# Altium PCB pcbLabIEEE.PcbDoc
Units mm, origin at the board's own origin, x right, y up, seen from the top; angles counter-clockwise.
Board outline 62 x 54 mm, 2 copper layers (Top Layer, Bottom Layer); 27 components, 13 nets, 100 pads, 2 vias.
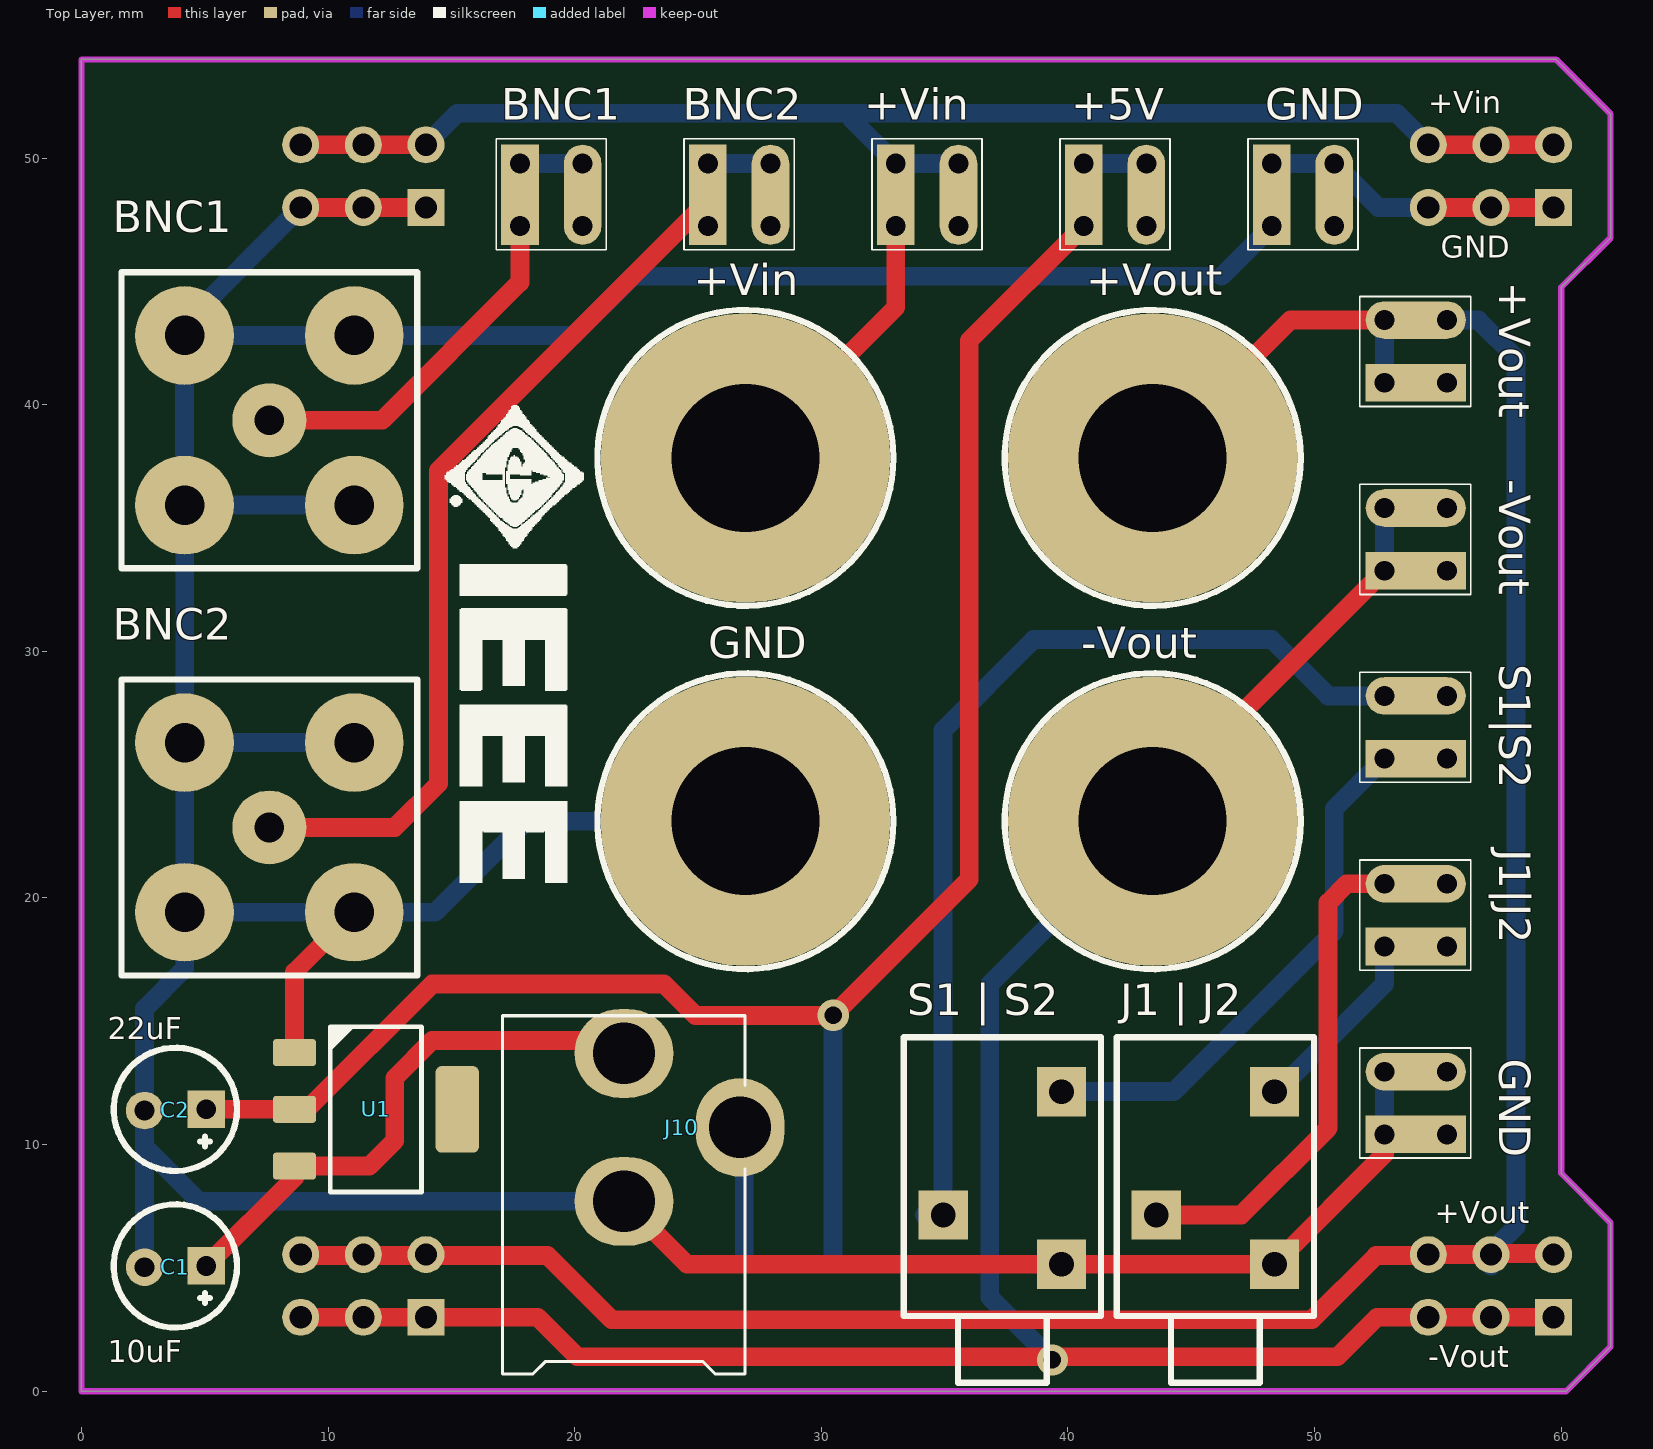
[diagram p0: Top Layer view]
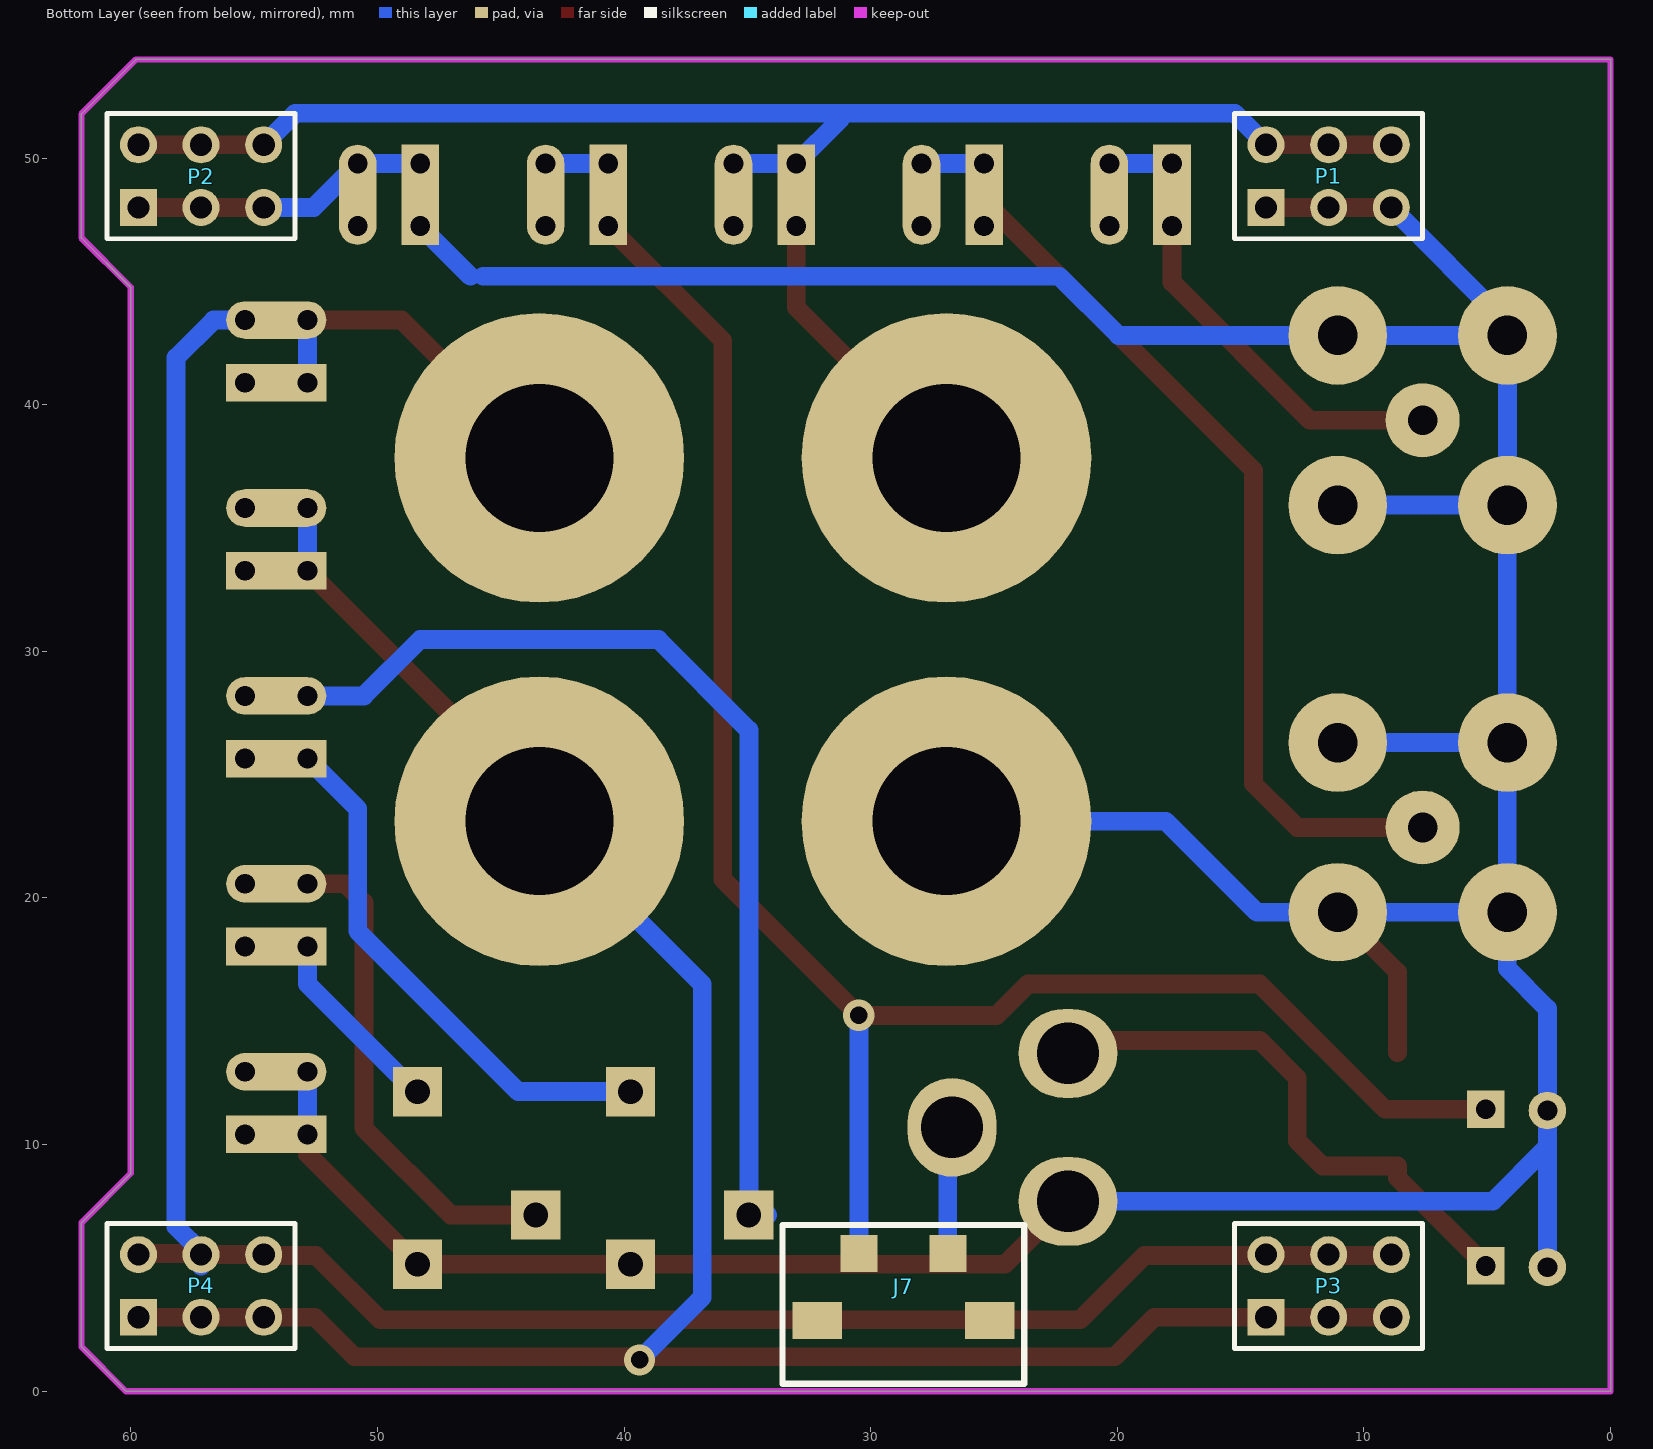
[diagram p1: Bottom Layer view, seen from below]

## Layer stack, top to bottom
Top Solder: solder mask 0.0102, Solder Resist, Dk 3.5
Top Layer: signal copper 0.0356
Dielectric 1: dielectric 0.32, FR-4, Dk 4.8
Bottom Layer: signal copper 0.0356
Bottom Solder: solder mask 0.0102, Solder Resist, Dk 3.5

## Board outline
0,0 0,54 59.792,54 62,51.792 62,46.76 60,44.76 60,8.834 62,6.834 62,1.802 60.198,0

## Design rules (kind name [scope] priority, off if disabled: settings)
Clearance [All] p1: gap=0.254
PolygonConnect [All] p1: connectstyle=Relief reliefconductorwidth=0.254 reliefentries=4 polygonreliefangle="90 Angle" airgapwidth=0.254
RoutingVias [All] p1: holewidth=0.711 width=1.27 viastyle="Through Hole" minholewidth=0.711 minwidth=1.27 maxholewidth=0.711 maxwidth=1.27
SolderMaskExpansion [All] p1: expansion=0.102
UnpouredPolygon [All] p1: allowunpoured=FALSE
Width [All] p1: maxlimit=0.762 minlimit=0.762 preferedwidth=0.762
29 further rules are at their usual default settings.

## Classes and differential pairs
component class pcbLabIEEE: +5V +Vin +Vout -Vout BNC1 BNC2 C1 C2 GND J1 J2 J7 J10 P1 P2 P3 P4 S1 S2 U1

## Components (designator, comment, footprint, x,y, rotation, side; value= is the part's Value field where it differs from the comment)
+5V "Header" HDR1X2 40.64,49.784 r0 top (schematic designator H7)
+Vin "BANANA" Banana 26.924,37.846 r0 top (schematic designator J2)
+Vin "Header" HDR1X2 33.02,49.784 r0 top (schematic designator H5)
+Vout "Header" HDR1X2 52.832,40.894 r90 top (schematic designator H9)
+Vout "BANANA" Banana 43.434,37.846 r0 top (schematic designator J3)
-Vout "BANANA" Banana 43.434,23.114 r0 top (schematic designator J6)
-Vout "Header" HDR1X2 52.832,33.274 r90 top (schematic designator H8)
BNC1 "BNC Fem. 50R" CONN_BNC 7.62,39.37 r0 top (schematic designator J1)
BNC1 "Header" HDR1X2 17.78,49.784 r0 top (schematic designator H1)
BNC2 "BNC Fem. 50R" CONN_BNC 7.62,22.86 r0 top (schematic designator J4)
BNC2 "Header" HDR1X2 25.4,49.784 r0 top (schematic designator H2)
C1 "10uF" Capacitor_E 3.81,5.08 r180 top
C2 "22uF" Capacitor_E 3.81,11.43 r180 top
GND "BANANA" Banana 26.924,23.114 r0 top (schematic designator J5)
GND "Header" HDR1X2 52.832,10.414 r90 top (schematic designator H10)
GND "Header" HDR1X2 48.26,49.784 r0 top (schematic designator H6)
"J1 | J2" "Audio Jack" CONN_AUDIO 45.974,3.048 r90 top (schematic designator J8)
J1|J2 "Header" HDR1X2 52.832,18.034 r90 top (schematic designator H3)
J7 "USB Micro Type B (recommended if hand soldering)" USB_MICRO-B_v2 29.972,5.842 r180 bottom
J10 "CONN_PWR_JACK_2.1x5.5mm" CONN_PWR_JACK_2.1x5.5mm 22,0 r180 top
P1 "Header 3X2A" HDR2X3_CEN 13.97,48 r180 bottom
P2 "Header 3X2A" HDR2X3_CEN 59.69,48 r180 bottom
P3 "Header 3X2A" HDR2X3_CEN 13.97,3 r180 bottom
P4 "Header 3X2A" HDR2X3_CEN 59.69,3 r180 bottom
"S1 | S2" "Audio Jack" CONN_AUDIO 37.338,3.048 r90 top (schematic designator J9)
S1|S2 "Header" HDR1X2 52.832,25.654 r90 top (schematic designator H4)
U1 "AMS1117" SOT223 11.938,11.43 r0 top

## Footprints (in the part's own frame and the unit in brackets; to place one, negate y for a bottom-side part, rotate by r counter-clockwise, add the part's x,y. Pads: shape width x height; smd on the part's side, far side on the other; paste and mask are expansions set on the pad)
Banana [mm] "Female"
  round 11.746 hole 6: 1(0,0)
  silkscreen extent -6,-6 6,6
Capacitor_E [mm]
  rect 1.524x1.524 hole 0.8: 1(-1.25,0)
  round 1.524 hole 0.8: 2(1.25,0.05)
  silkscreen extent -2.5,-2.5 2.5,2.5, body extent -2.49,-2.45 2.49,2.55, height 1.5
CONN_AUDIO [mm]
  rect 2x2 hole 1: 1(2.1,-2.4) 2(4.1,2.4) 3(9.1,-2.4)
  silkscreen extent -2.7,-4 11.3,4
CONN_BNC [mm]
  round 3 hole 1.2: 1(0,0)
  round 4 hole 1.6: 2(-3.44,-3.44) 2(-3.44,3.44) 2(3.44,-3.44) 2(3.44,3.44)
  silkscreen extent -6,-6 6,6
CONN_PWR_JACK_2.1x5.5mm [mm] "Power Connector, 2.1mm ID, 5.5mm OD"
  oval 4x3.6 hole 2.5: 1(0,-13.7) 2(0,-7.7)
  oval 3.6x4 hole 2.5: 3(-4.7,-10.7)
  silkscreen extent -4.9,-15.22 4.92,-0.7, body extent -4.9,-14.1 4.5,0, height 11
HDR1X2 [mil] "Connector; Header; 2 Position"
  rect 60x160 hole 31.5 copper offset 0,50: 1(0,-100)
  rect 60x160 hole 31.5 copper offset 0,-50: 1(0,0)
  oval 60x160 hole 31.5 copper offset 0,50: 2(100,-100)
  oval 60x160 hole 31.5 copper offset 0,-50: 2(100,0)
  silkscreen extent -38,-138 138,39
HDR2X3_CEN [mm] "Connector; Header; 3x2 Position"
  rect 1.5x1.5 hole 0.9: 1(0,0)
  round 1.5 hole 0.9: 2(2.54,0) 3(5.08,0) 4(0,2.54) 5(2.54,2.54) 6(5.08,2.54)
  silkscreen extent -1.27,-1.27 6.35,3.81
SOT223 [mm] "SOT223 /SC-73"
  round 1 on Mech15: 0(0,0)
  rrect25% 1.75x1.1 smd: 1(-3.3,2.3) 2(-3.3,0) 3(-3.3,-2.3)
  rrect25% 1.75x3.5 smd: 4(3.3,0)
  silkscreen extent -1.85,-3.35 1.85,3.35, body extent -3.65,-3.35 3.65,3.35, height 1.8
USB_MICRO-B_v2 [mm]
  rect 1.5x1.5 smd: 1(-0.5,-0.25) 5(3.1,-0.25)
  rect 2x1.5 smd: SH(-2.2,-2.975) SH(4.8,-2.975)
  silkscreen extent -3.6,-5.54 6.2,0.9

## Part data
+5V +Vin +Vout -Vout BNC1 BNC2 GND GND J1|J2 S1|S2: library part Header2P, "Header, 2-pin"
+Vin +Vout -Vout GND: "Female Connector"
BNC1 BNC2: library part CONN_BNC_FEM_50R, "Connector BNC 50 Ohm right-angle PCB mounted"
C1 C2: library part CAPE
"J1 | J2" "S1 | S2": library part CONN_MINIPHONEJACK, "Stereo phone jack mini"
J7: library part USB_Micro_TypeB_FCI, "Connector SMD-THD USB Micro Type B middle mount"
P1 P2 P3 P4: "Header, 3-Pin, Dual row"
U1: "Voltage Regulator"

## Via types
v1: diameter 1.27, hole 0.711, Top Layer to Bottom Layer, 2 vias

## Nets (pads, with @x,y where several pads share a name; then routed paths per layer and width w, separated by ;. In a path a pad name is that pad's centre, name@x,y a point inside that pad or via, vN(x,y) a via of type N, cw(c..) or ccw(c..) an arc to the next point about the centre after c; other vN are vias at no path point)
+5V: +5V.1 +5V.2 C2.1 J7.1 U1.2 | length 79
  Top Layer w0.762: C2.1 U1.2 9.144,11.43 14.224,16.51 23.622,16.51 24.892,15.24 v1(30.48,15.24) 36,20.76 36,42.604 40.64,47.244 +5V.1@40.64,49.784
  Bottom Layer w0.762: J7.1 30.472,15.232 v1(30.48,15.24) ; +5V.1@40.64,49.784 +5V.2@43.18,49.784
+VOUT: +Vout.1 +Vout.2 P3.4 P3.5 P3.6 P4.4 P4.5 P4.6 | length 109.9
  Top Layer w0.762: P3.6@9.31,5.5 18.9,5.5 21.5,2.9 49.89,2.9 52.49,5.5 P4.6@54.19,5.5 ; +Vout.1@43.434,37.846 49.022,43.434 52.578,43.434 +Vout.2@52.832,43.688 ; P4.6 P4.5 ; P4.5@57.15,5.58 P4.4@59.69,5.58
  Bottom Layer w0.762: +Vout.1@53.34,40.894 52.832,41.402 52.832,43.434 56.642,43.434 58.166,41.91 58.166,6.666 57.15,5.65 P4.5@57.15,5.08
-VOUT: -Vout.1 -Vout.2 P3.1 P3.2 P3.3 P4.1 P4.2 P4.3 | length 93.9
  Top Layer w0.762: P3.3@9.35,3 18.5,3 20.1,1.4 v1@39.37,1.4 ; v1(39.37,1.27) v1@39.37,1.4 ; -Vout.1@42.672,23.114 -Vout.1@52.832,33.274 ; P4.3@54.15,3 52.53,3 50.93,1.4 v1@39.37,1.4 ; P4.3 P4.2 P4.1
  Bottom Layer w0.762: v1(39.37,1.27) 36.83,3.81 36.83,16.51 -Vout.1@43.434,23.114 ; -Vout.1@52.832,33.274 -Vout.2@52.832,35.814
GND: "J1 | J2.1" "S1 | S2.1" BNC1.2@4.18,35.93 BNC1.2@4.18,42.81 BNC1.2@11.06,35.93 BNC1.2@11.06,42.81 BNC2.2@4.18,19.42 BNC2.2@4.18,26.3 BNC2.2@11.06,19.42 BNC2.2@11.06,26.3 C1.2 C2.2 GND.1 GND.2 J10.2 P1.1 P1.2 P1.3 P2.1 P2.2 P2.3 U1.1 | length 212.7
  Top Layer w0.762: U1.1 8.638,16.998 BNC2.2@11.06,19.42 ; P1.3 P1.2 P1.1 ; J10.2 24.552,5.148 38.976,5.148 48.12,5.148 ; 48.374,5.148 52.832,9.606 GND.1@52.832,10.414 ; P2.3 P2.2 P2.1
  Bottom Layer w0.762: C1.2 2.56,9.906 ; BNC2.2@4.18,19.42 BNC2.2@4.191,19.42 ; BNC2.2@4.18,26.3 BNC2.2@4.191,26.3 ; BNC1.2@4.18,35.93 BNC1.2@4.18,42.81 ; P1.3 4.18,43.29 BNC1.2@4.18,42.81 ; BNC2.2@11.06,26.3 BNC2.2@4.191,26.3 ; BNC1.2@11.06,35.93 4.191,35.93 BNC2.2@4.191,26.3 ; J10.2 4.766,7.7 2.56,9.906 ; GND.1@26.924,23.114 18.034,23.114 14.34,19.42 11.06,19.42 BNC2.2@4.191,19.42 ; 45.72,45.212 22.352,45.212 19.95,42.81 11.06,42.81 BNC1.2@4.18,42.81 ; 46.228,45.212 48.26,47.244 48.26,49.784 50.8,49.784 52.584,48 P2.3 ; GND.1@52.832,10.414 GND.2@52.832,12.954 ; 2.56,9.906 C2.2 2.56,15.514 4.191,17.145 BNC2.2@4.191,19.42 ; BNC2.2@4.191,19.42 BNC2.2@4.191,26.3
NetC1_1: C1.1 J10.1 U1.3 | length 24.1
  Top Layer w0.762: C1.1 8.638,8.658 U1.3 11.67,9.13 12.7,10.16 12.7,12.7 14.224,14.224 21.476,14.224 J10.1 J10.1@20.59,13.7
NetH1_1: BNC1.1 BNC1.2@20.32,47.244 BNC1.2@20.32,49.784 | length 19.8
  Top Layer w0.762: BNC1.1@7.62,39.37 12.192,39.37 17.78,44.958 17.78,47.244 BNC1.1@17.78,49.784
  Bottom Layer w0.762: BNC1.1@17.78,49.784 BNC1.2@20.32,49.784
NetH2_1: BNC2.1 BNC2.2@27.94,47.244 BNC2.2@27.94,49.784 | length 39.8
  Top Layer w0.762: BNC2.1@7.62,22.86 12.7,22.86 14.478,24.638 14.478,37.338 25.4,48.26 BNC2.1@25.4,49.784
  Bottom Layer w0.762: BNC2.1@25.4,49.784 BNC2.2@27.94,49.784
NetH3_1: "J1 | J2.3" J1|J2.1 | length 8
  Bottom Layer w0.762: 48.549,11.973 48.549,12.227 52.832,16.51 52.832,17.526 J1|J2.1@53.34,18.034
NetH3_2: "J1 | J2.2" J1|J2.2 | length 20.2
  Top Layer w0.762: 43.574,7.148 47.026,7.148 50.546,10.668 50.546,19.812 51.308,20.574 J1|J2.2@52.832,20.574
NetH4_1: "S1 | S2.3" S1|S2.1 | length 22.1
  Bottom Layer w0.762: 39.738,12.148 44.292,12.148 50.8,18.656 50.8,23.622 52.832,25.654 S1|S2.1@53.34,25.654
NetH4_2: "S1 | S2.2" S1|S2.2 | length 41.5
  Bottom Layer w0.762: 34.176,7.148 34.798,7.77 ; 34.938,7.148 34.938,26.81 38.608,30.48 48.26,30.48 50.546,28.194 52.832,28.194 53.086,28.194 S1|S2.2@53.34,28.448
NetJ7_5: J7.5 J10.3 | length 5.2
  Bottom Layer w0.762: J10.3 26.872,10.528 J7.5
VCC: +Vin.1 +Vin.2 P1.4 P1.5 P1.6 P2.4 P2.5 P2.6 | length 71.4
  Top Layer w0.762: P1.6 P1.5 P1.4 ; +Vin.1@26.924,37.846 33.02,43.942 33.02,47.244 +Vin.1@33.02,49.784 ; P2.6 P2.5 P2.4
  Bottom Layer w0.762: P1.4@13.964,50.54 15.24,51.816 53.34,51.816 P2.6@54.616,50.54 ; 31.242,51.562 33.02,49.784 +Vin.2@35.56,49.784
pads on no net: J7.SH U1.0 U1.4

## Keep-outs
Keep-Out Layer:
  the board outline again, w0.254

## Silkscreen, mask and mechanical layers (free items; w line width, h text height)
Top Overlay:
  drawing of 701 lines, arcs and shapes, not listed

## Text inside footprints (layer, text, board x,y; h text height)
P2: Top Overlay "GND" at 55.118,45.968 h0.89; Top Overlay "+Vin" at 54.61,51.81 h0.89
P4: Top Overlay "-Vout" at 54.61,0.968 h0.89; Top Overlay "+Vout" at 54.864,6.81 h0.89